# EAGLE board Sildr 1.1 & 1.2 Extender (EAGLE 9.4.0)
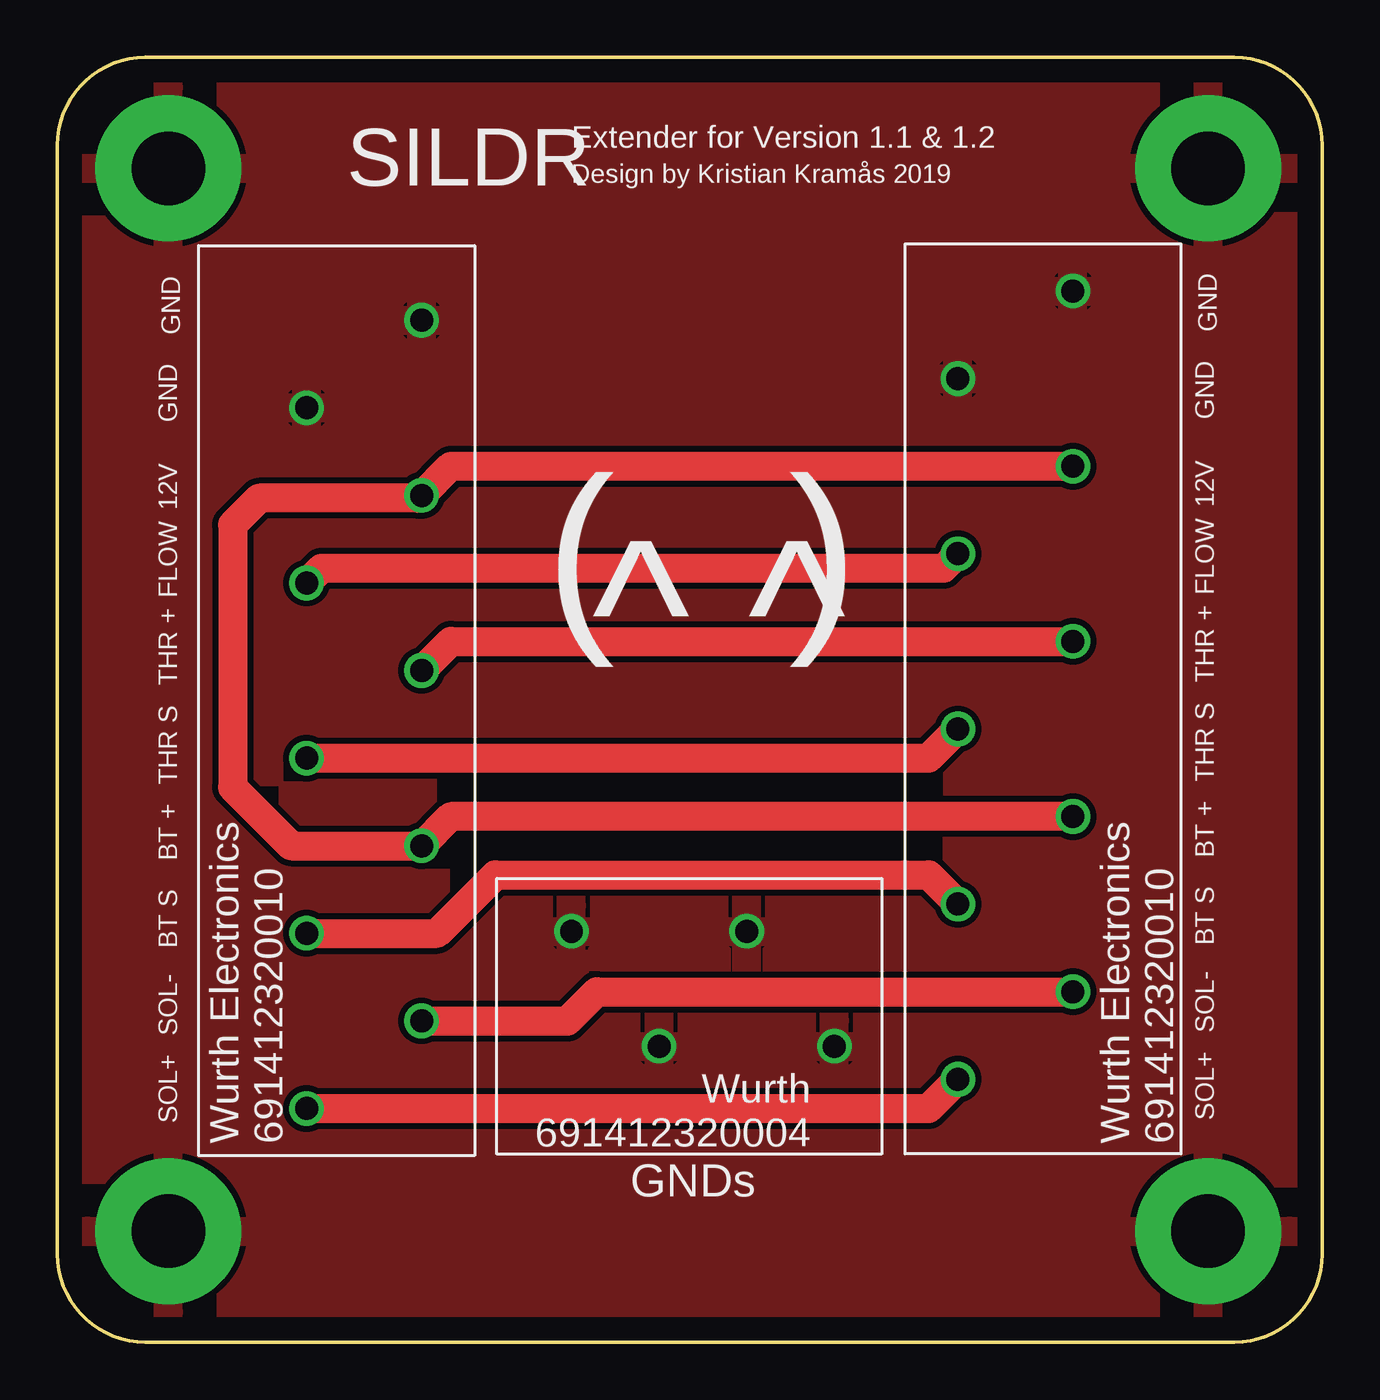
[diagram p0: board, top side]
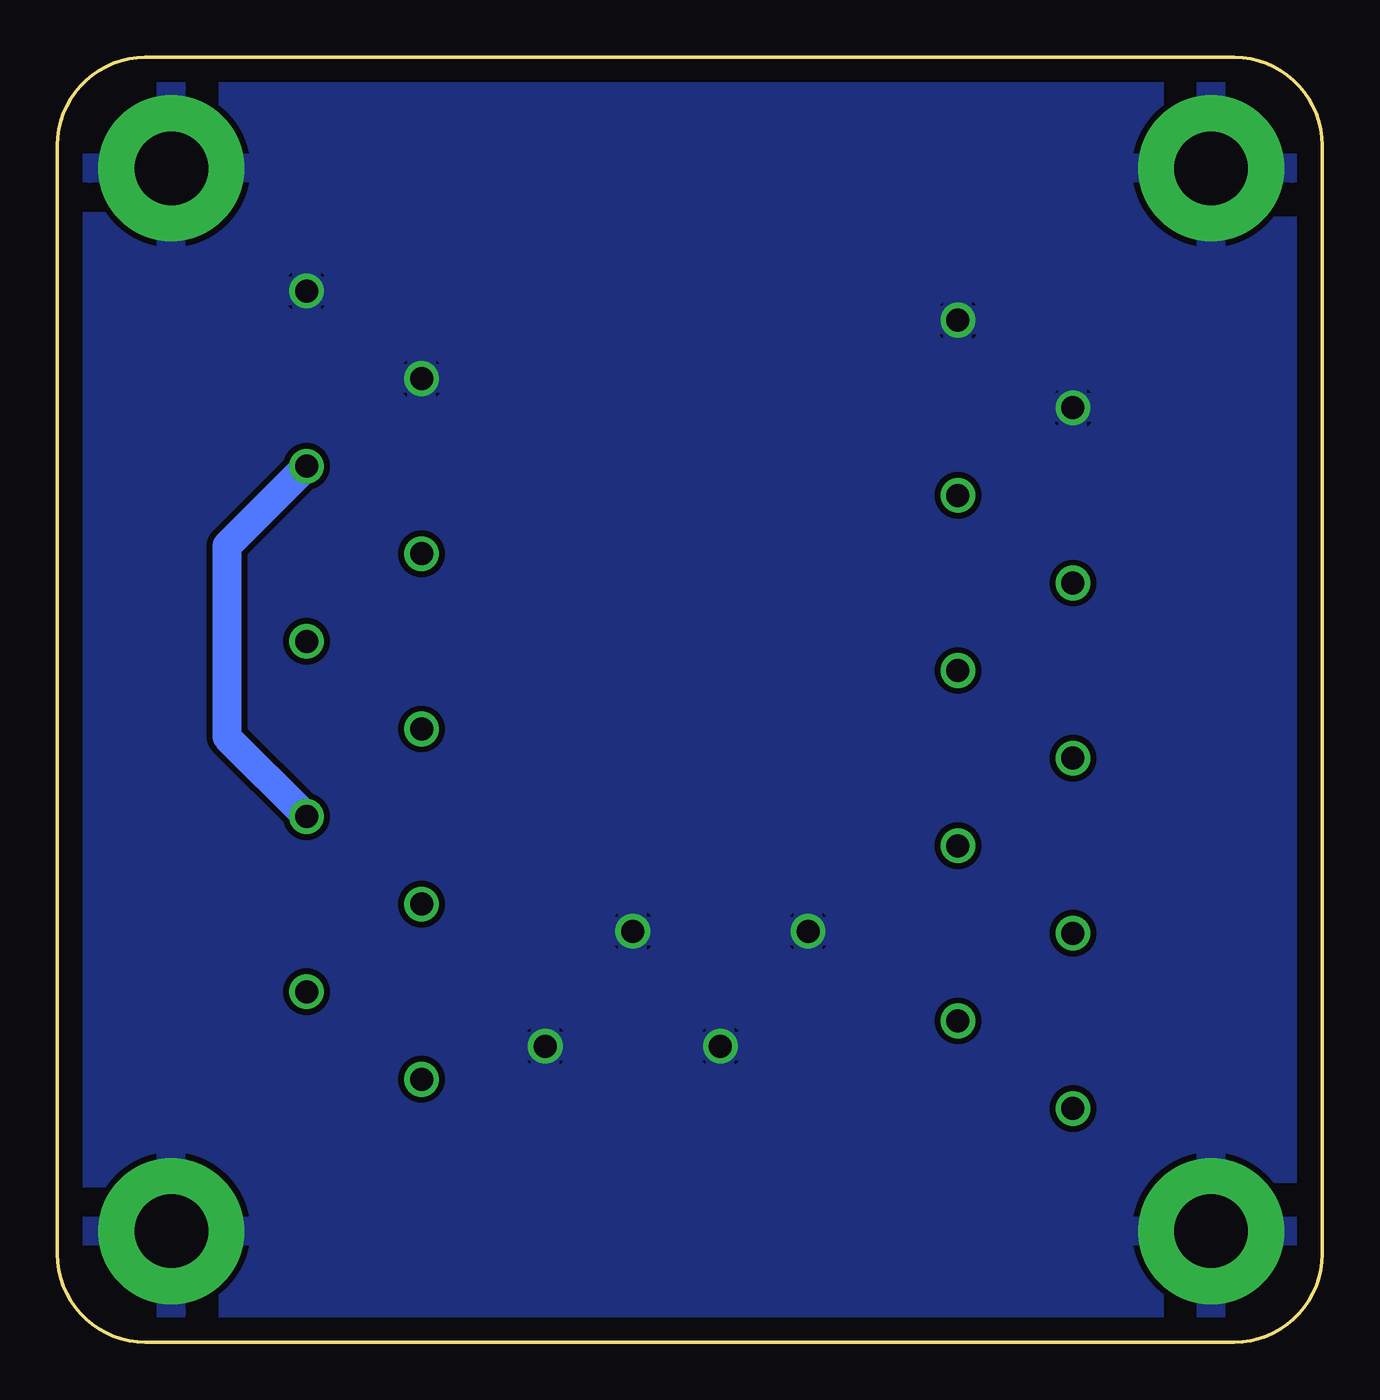
[diagram p1: board, bottom side, seen from below]

Size 54.99 x 55.88 mm. Coordinates in mm from the lower left corner, seen from the top.
Outline: 3.81,55.88 51.18,55.88 arc-90 54.99,52.07 54.99,3.81 arc-90 51.18,0 3.81,0 arc-90 0,3.81 0,52.07 arc-90 3.81,55.88
Copper layers (1*16): Top 0.035mm / dielectric 1.5mm / Bottom 0.035mm
Design rules "default": minimum track width 6mil, minimum drill 0.35mm, track to track 6mil, track to pad 6mil, pad to pad 6mil, via to via 6mil, smd to smd 6mil, copper to edge 40mil, drill to drill 6mil, minimum pad ring 10mil, minimum via ring 8mil, stop-mask expansion 4mil, vias tented up to drill 0mil, thermal gap 10mil

## Footprints (pad centres in the part's own frame; a part is rotated, then mirrored left to right if it is on the bottom)
STANDOFF-ELECTRICAL = drill 3.2 pad 6.35: P1 0,0
691412320004 = drill 1: 1 5.715,-2.5; 2 1.905,2.5; 3 -1.905,-2.5; 4 -5.715,2.5
691412320010 = drill 1: 1 17.145,-2.5; 2 13.335,2.5; 3 9.525,-2.5; 4 5.715,2.5; 5 1.905,-2.5; 6 -1.905,2.5; 7 -5.715,-2.5; 8 -9.525,2.5; 9 -13.335,-2.5; 10 -17.145,2.5

## Placement (x,y rotation side)
H1  STANDOFF_ELECTRICAL  [STANDOFF-ELECTRICAL]  4.83,4.83 0 top
H2  STANDOFF_ELECTRICAL  [STANDOFF-ELECTRICAL]  4.83,51.05 0 top
H3  STANDOFF_ELECTRICAL  [STANDOFF-ELECTRICAL]  50.04,51.05 0 top
H6  STANDOFF_ELECTRICAL  [STANDOFF-ELECTRICAL]  50.04,4.83 0 top
J1  [691412320004]  28.07,15.37 0 top
J2  [691412320010]  13.34,27.3 270 top
J4  [691412320010]  41.66,28.57 90 top

## Library data of the parts
H1-H3 H6 = SparkFun-Hardware
J1 J2 J4 = TerminalBlocks (rev19a)

## Nets
3.3V: J2.6 J4.5
12V: J2.4 J2.8 J4.3 J4.7
A0: J2.5 J4.6
BUTTON_OUT: J2.3 J4.8
D6: J2.7 J4.4
GND: H1.P1 H2.P1 H3.P1 H6.P1 J1.1 J1.2 J1.3 J1.4 J2.9 J2.10 J4.1 J4.2
SOL+: J2.1 J4.10
SOL-: J2.2 J4.9

## Tracks (layer width: path | path; a pad name or v marks a point on that pad's centre or on a via)
3.3V
  Top 1.27: J2.6 17.11,30.48 J4.5
12V
  Top 1.27: J4.7 17.11,22.86 J2.4 10.16,21.59 7.62,24.13 7.62,35.56 8.76,36.7 15.71,36.7 J2.8 17.11,38.1 J4.3
  Bottom 1.27: J4.3 47.62,34.63 47.62,26.33 J4.7
A0
  Top 1.27: J4.6 37.89,25.4 J2.5
BUTTON_OUT
  Top 1.27: J2.3 16.51,17.78 19.05,20.32 37.89,20.32 J4.8
D6
  Top 1.27: J2.7 11.47,33.66 38.52,33.66 J4.4
GND
  pour Top (isolate 0.254): -1.27,57.15 -1.27,-1.27 55.88,-1.27 55.88,57.15
  pour Bottom (isolate 0.254): -1.27,58.42 -1.27,-1.27 55.88,-1.27 55.88,58.42
SOL+
  Top 1.27: J4.10 37.89,10.16 J2.1
SOL-
  Top 1.27: J2.2 22.18,13.97 23.45,15.24 J4.9

## Text on the board
tPlace: Extender for Version 1.1 & 1.2 | SILDR | Design by Kristian Kramås 2019 | GND | GND | GND | GND | 12V | 12V | ‿ | FLOW | FLOW | ( ) | THR + | ^ ^ | THR + | THR S | THR S | BT + | BT + | BT S | BT S | SOL- | SOL- | Wurth / 691412320004 | SOL+ | SOL+ | Wurth Electronics / 691412320010 | Wurth Electronics / 691412320010 | GNDs